# EAGLE board Laptimer (EAGLE 6.3)
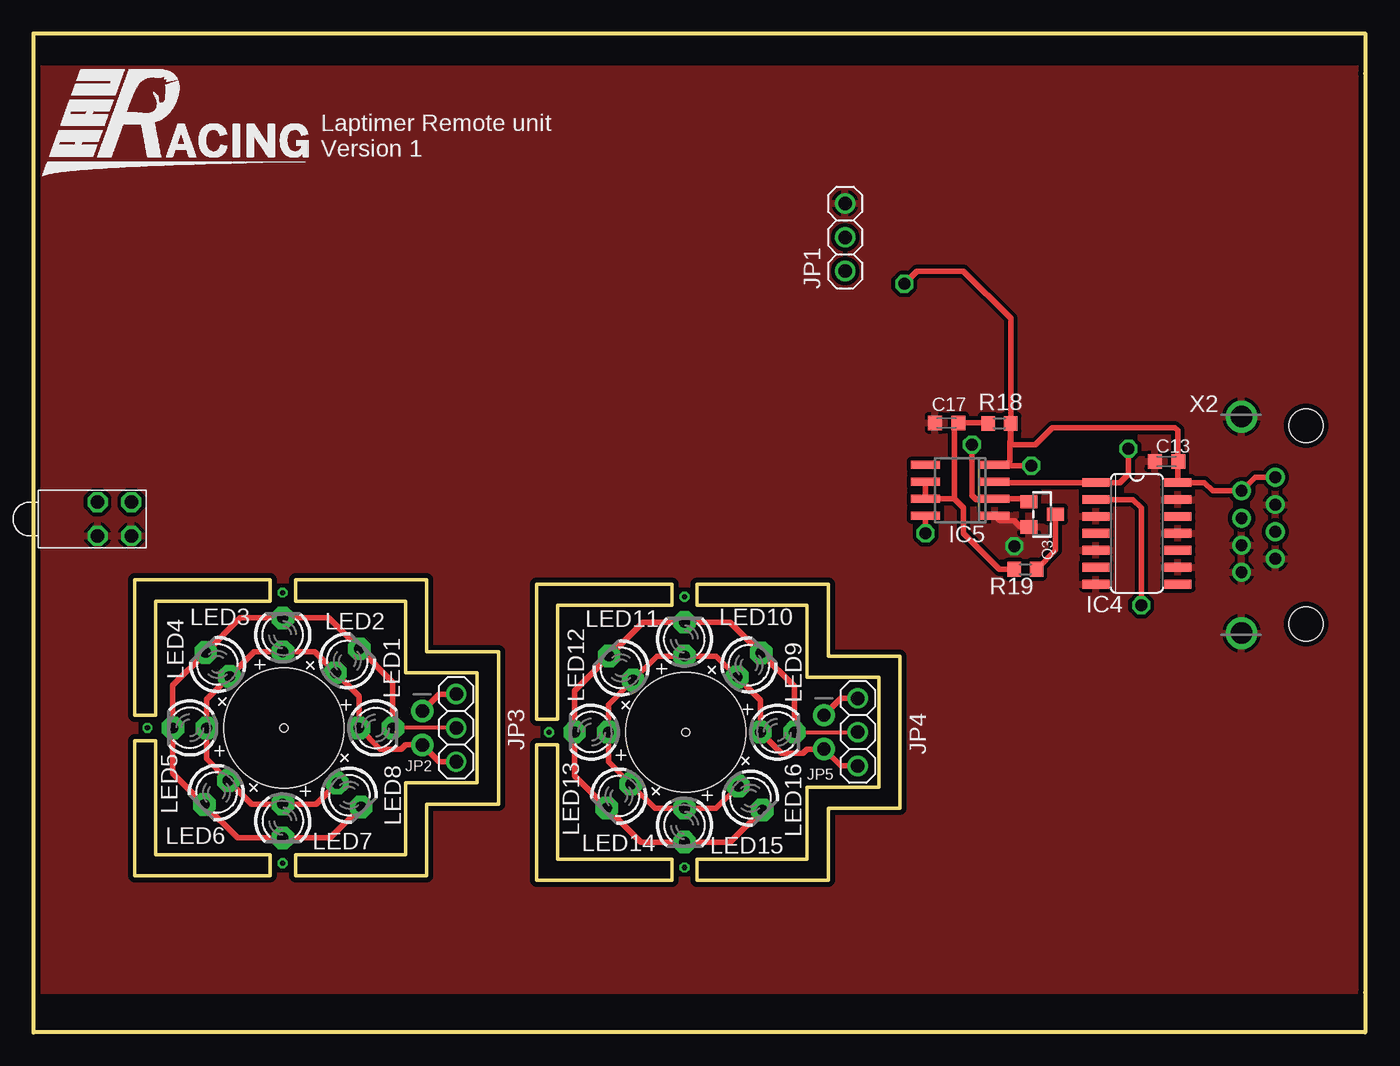
[diagram p0: board, top side]
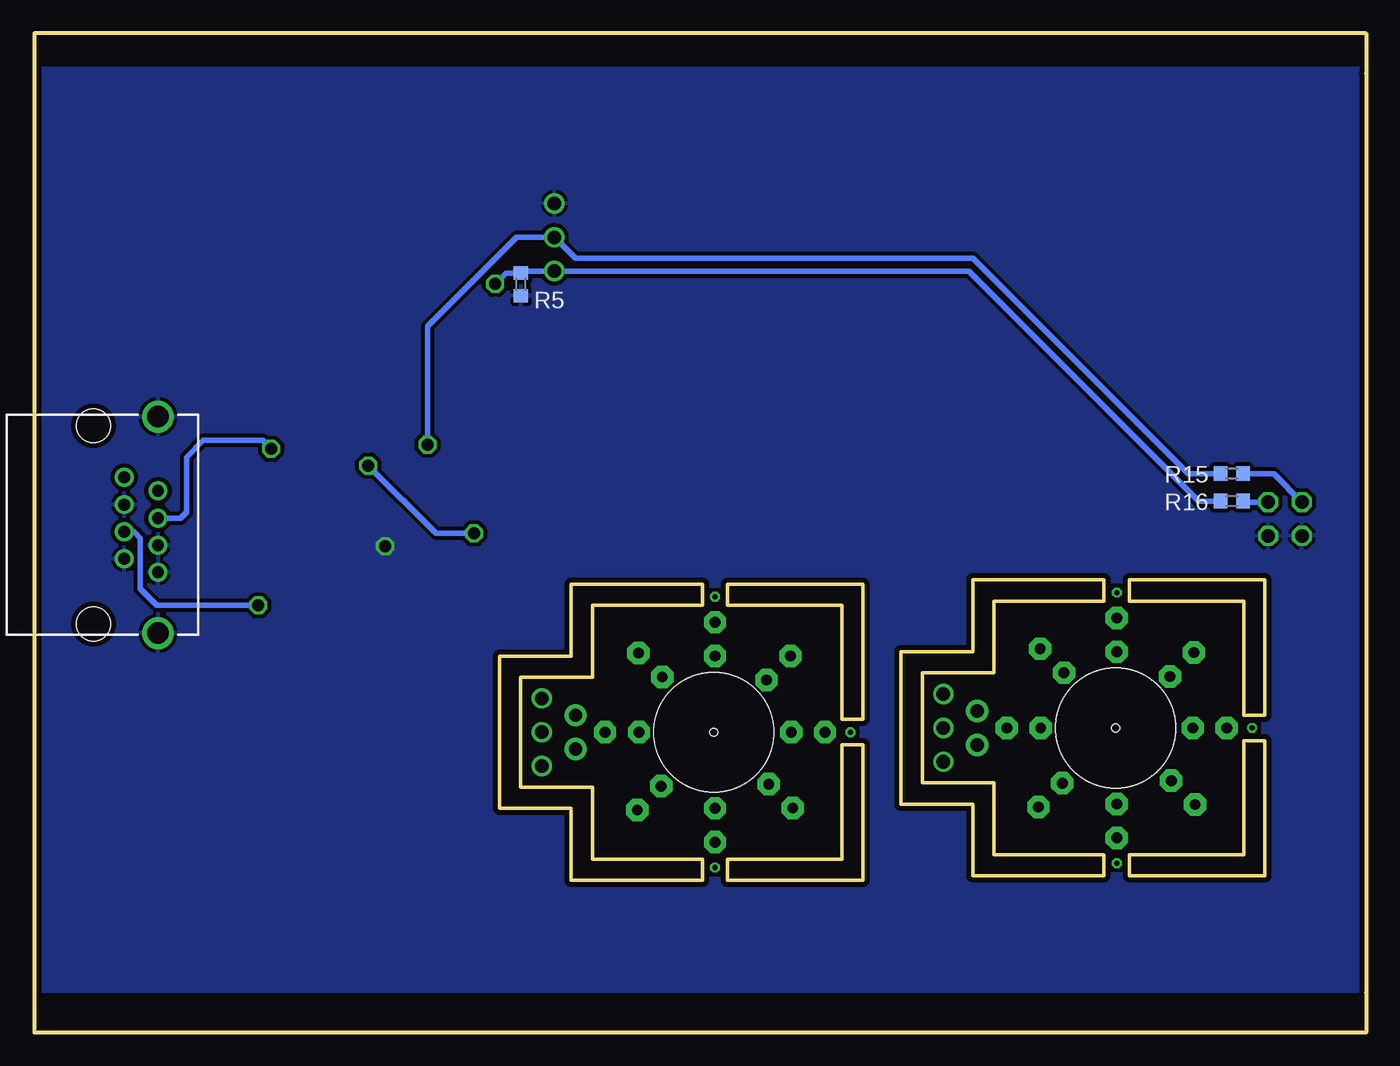
[diagram p1: board, bottom side, seen from below]

Size 100 x 75 mm. Coordinates in mm from the lower left corner, seen from the top.
Outline: 0,75 100,75 100,72 100,3 100,0 0,0 0,3 0,72 0,75
Outline: 33.34,18.73 33.34,26.99 27.94,26.99 27.94,32.38 19.68,32.38 19.68,33.97 29.53,33.97 29.53,28.57 34.92,28.57 34.92,17.14 29.53,17.14 29.53,11.75 19.68,11.75 19.68,13.34 27.94,13.34 27.94,18.73 33.34,18.73
Outline: 9.21,13.34 17.78,13.34 17.78,11.75 7.62,11.75 7.62,21.91 9.21,21.91 9.21,13.34
Outline: 9.21,32.38 17.78,32.38 17.78,33.97 7.62,33.97 7.62,23.81 9.21,23.81 9.21,32.38
Outline: 63.5,18.41 63.5,22.54 63.5,26.67 58.1,26.67 58.1,32.07 49.85,32.07 49.85,33.66 59.69,33.66 59.69,28.26 65.09,28.26 65.09,16.83 59.69,16.83 59.69,11.43 49.85,11.43 49.85,13.02 58.1,13.02 58.1,18.41 63.5,18.41
Outline: 39.37,13.02 47.94,13.02 47.94,11.43 37.78,11.43 37.78,21.59 39.37,21.59 39.37,13.02
Outline: 39.37,32.07 47.94,32.07 47.94,33.66 37.78,33.66 37.78,23.5 39.37,23.5 39.37,32.07
Copper layers (1*16): Top 0.0356mm / dielectric 1.5011mm / Bottom 0.0356mm
Design rules "LaenPCBOrder *": minimum track width 6mil, minimum drill 13mil, track to track 12mil, track to pad 12mil, pad to pad 12mil, via to via 12mil, smd to smd 12mil, copper to edge 15mil, drill to drill 6mil, minimum pad ring 7mil, minimum via ring 7mil, stop-mask expansion 3mil, vias tented up to drill 0mil, thermal gap 10mil
Holes 9 mm at 18.83,22.86 48.99,22.54
Holes 0.6 mm at 18.82,22.85 48.99,22.53

## Footprints (pad centres in the part's own frame; a part is rotated, then mirrored left to right if it is on the bottom)
C0603K = smd 1.05 x 1.08: 1 -0.875,0; 2 0.875,0
SO14 = smd 0.66 x 2.032: 1 -3.81,-3.073; 2 -2.54,-3.073; 3 -1.27,-3.073; 4 0,-3.073; 5 1.27,-3.073; 6 2.54,-3.073; 7 3.81,-3.073; 8 3.81,3.073; 9 2.54,3.073; 10 1.27,3.073; 11 0,3.073; 12 -1.27,3.073; 13 -2.54,3.073; 14 -3.81,3.073
SO08 = smd 0.6 x 2.2: 1 -1.905,-2.6; 2 -0.635,-2.6; 3 0.635,-2.6; 4 1.905,-2.6; 5 1.905,2.6; 6 0.635,2.6; 7 -0.635,2.6; 8 -1.905,2.6
1X03 = drill 1.016: 1 -2.54,0; 2 0,0; 3 2.54,0
1X02_ROUND = drill 1 pad 1.676: 1 -1.27,0; 2 1.27,0
LED3MM = drill 0.813 pad 1.676 octagon: A -1.27,0; K 1.27,0
SOT23-WIDE = smd 1 x 1.27: 1 -0.95,-1; 2 0.95,-1; 3 0,1
R0603 = smd 1 x 1.1: 1 -0.85,0; 2 0.85,0
BI-LEVEL-LED-INDICATOR = drill 1 octagon: ANODE1 1.27,1.27; ANODE2 1.27,-1.27; CATHODE1 -1.27,1.27; CATHODE2 -1.27,-1.27
GLX-S-88M = drill 0.9 pad 1.422: 1 -3.57,-2.3; 2 -2.55,-4.84; 3 -1.53,-2.3; 4 -0.51,-4.84; 5 0.51,-2.3; 6 1.53,-4.84; 7 2.55,-2.3; 8 3.57,-4.84 | drill 1.6 pad 2.184: S1 -8.125,-4.84; S2 8.125,-4.84 | hole 2.55: -7.44,0; 7.44,0

## Placement (x,y rotation side)
C13  100n  [C0603K]  85.09,42.86 0 top
C17  100n  [C0603K]  68.58,45.76 180 top
IC4  74HC04D  [SO14]  82.87,37.47 270 top
IC5  NE555D  [SO08]  69.6,40.7 90 top
JP1  [1X03]  60.96,59.69 90 top
JP2  [1X02_ROUND]  29.21,22.86 270 top
JP3  [1X03]  31.75,22.86 270 top
JP4  [1X03]  61.91,22.54 270 top
JP5  [1X02_ROUND]  59.37,22.54 270 top
LED1  SFH 309  [LED3MM]  25.72,22.86 0 top
LED2  SFH 309  [LED3MM]  23.59,27.9 45 top
LED3  SFH 309  [LED3MM]  18.73,29.84 90 top
LED4  SFH 309  [LED3MM]  13.84,27.62 135 top
LED5  SFH 309  [LED3MM]  11.75,22.86 180 top
LED6  SFH 309  [LED3MM]  13.75,18 225 top
LED7  SFH 309  [LED3MM]  18.73,15.88 270 top
LED8  SFH 309  [LED3MM]  23.72,17.82 315 top
LED9  SFH 309  [LED3MM]  55.88,22.54 0 top
LED10  SFH 309  [LED3MM]  53.75,27.58 45 top
LED11  SFH 309  [LED3MM]  48.9,29.53 90 top
LED12  SFH 309  [LED3MM]  44.13,27.36 135 top
LED13  SFH 309  [LED3MM]  41.91,22.54 180 top
LED14  SFH 309  [LED3MM]  43.96,17.74 225 top
LED15  SFH 309  [LED3MM]  48.9,15.56 270 top
LED16  SFH 309  [LED3MM]  53.84,17.59 315 top
Q3  [SOT23-WIDE]  75.76,38.89 270 top
R5  1k  [R0603]  63.47,56.15 270 bottom
R15  220  [R0603]  10.1,41.95 0 bottom
R16  220  [R0603]  10.1,39.88 0 bottom
R18  1k  [R0603]  72.55,45.71 180 top
R19  100  [R0603]  74.49,34.77 180 top
U$19  BI-LEVEL-LED-INDICATOR  [BI-LEVEL-LED-INDICATOR]  6.1,38.54 90 top
X2  GLX-S-88M  [GLX-S-88M]  95.57,38.1 270 top

## Library data of the parts
C13 C17 R5 R15 R16 R18 R19 = rcl
IC4 = 74xx-eu
IC5 = linear
JP1 JP3 JP4 LED1-LED16 = adafruit
JP2 JP5 Q3 = microbuilder
U$19 = unicorn_v2
X2 = con-kycon; OC_FARNELL: unknown; OC_NEWARK: unknown

## Nets
5.0V: C13.2 IC4.14 IC5.4 IC5.8 JP1.1 R5.1 R16.1 R18.1 X2.1 X2.2
GND: C13.1 C17.2 IC4.3 IC4.5 IC4.7 IC4.9 IC4.11 IC4.13 IC5.1 JP1.3 Q3.2 R5.2 U$19.CATHODE1 U$19.CATHODE2 X2.3 X2.6 X2.7 X2.8 X2.S1 X2.S2
INT: JP3.2 LED1.K LED2.K LED3.K LED4.K LED5.K LED6.K LED7.K LED8.K
INT1: JP4.2 LED9.K LED10.K LED11.K LED12.K LED13.K LED14.K LED15.K LED16.K
N$7: JP4.1 JP5.1
N$8: JP4.3 JP5.2 LED9.A LED10.A LED11.A LED12.A LED13.A LED14.A LED15.A LED16.A
N$10: JP2.1 JP3.1
N$22: IC4.2 X2.5
N$25: R15.2 U$19.ANODE1
N$32: R16.2 U$19.ANODE2
N$36: C17.1 IC5.6 IC5.7 R18.2 R19.2
N$40: JP2.2 JP3.3 LED1.A LED2.A LED3.A LED4.A LED5.A LED6.A LED7.A LED8.A
N$41: Q3.3 R19.1
PT-IN: IC5.2 JP1.2 Q3.1 R15.1
PT-OUT: IC4.1 IC5.3 X2.4

## Tracks (layer width: path | path; a pad name or v marks a point on that pad's centre or on a via)
5.0V  (via drill 0.9)
  Top 0.406: X2.1 91.75,41.67 X2.2 88.57,40.65 87.95,41.27 IC4.14 85.94,42.84 | 85.94,42.84 C13.2 | 85.94,42.84 85.94,45.19 85.72,45.4 76.52,45.4 75.25,44.13 73.41,44.13 | 73.41,44.13 R18.1 73.34,44.07 73.34,42.86 73.08,42.6 IC5.4 72.25,42.55 v74.93,42.55 | IC5.8 v66.99,37.47 | 73.41,44.13 73.41,53.59 69.85,57.15 66.36,57.15 v65.41,56.2
  Bottom 0.406: v66.99,37.47 69.85,37.47 v74.93,42.55 | R16.1 12.58,39.88 29.84,57.15 JP1.1 63.64,57.15 R5.1 64.6,57 v65.41,56.2
GND  (via drill 0.9)
  Top 0.406: IC5.1 72.57,38.42 73.66,38.42 74.13,37.94 Q3.2
  other vias: 73.66,36.51
  pour Top: 0,72.33 100.14,72.33 100.14,3.12 0.13,3.12
  pour Bottom: 0,72.33 100.14,72.33 100.14,3.12 0.13,3.12
INT
  Top 0.305: JP3.2 LED1.K
  Top 0.406: LED1.K 26.99,26.3 LED2.K 22.17,31.11 LED3.K 15.54,31.11 LED4.K 10.48,26.06 LED5.K 10.48,19.48 LED6.K 15.35,14.61 LED7.K 22.3,14.61 LED8.K
INT1
  Top 0.305: LED9.K JP4.2
  Top 0.406: LED9.K 57.15,25.98 LED10.K 52.33,30.8 LED11.K 45.77,30.8 LED12.K 40.64,25.66 LED13.K 40.64,19.27 42.65,17.25 LED14.K 45.62,14.29 LED15.K 52.33,14.29 LED16.K
N$1  (via drill 0.38)
  other vias: 18.73,12.7
N$2  (via drill 0.38)
  other vias: 8.57,22.86
N$3  (via drill 0.38)
  other vias: 18.73,33.02
N$4  (via drill 0.38)
  other vias: 48.9,12.38
N$5  (via drill 0.38)
  other vias: 38.73,22.54
N$6  (via drill 0.38)
  other vias: 48.9,32.7
N$7
  Top 0.406: JP4.1 60.64,25.08 JP5.1
N$8
  Top 0.406: JP4.3 60.64,20 JP5.2 58.1,21.27 57.78,20.95 56.2,20.95 LED9.A 54.61,24.93 LED10.A 51.28,28.26 LED11.A 46.83,28.26 LED12.A 43.18,24.61 LED13.A 43.18,20.32 LED14.A 46.67,16.83 LED15.A 51.28,16.83 LED16.A
N$10
  Top 0.406: JP3.1 30.48,25.4 JP2.1
N$22  (via drill 0.9)
  Top 0.406: v83.19,32.07 83.19,39.37 82.55,40.01 IC4.2
  Bottom 0.406: X2.5 92.52,37.59 92.04,37.12 92.04,33.31 90.81,32.07 v83.19,32.07
N$25
  Bottom 0.406: R15.2 6.96,41.95 U$19.ANODE1
N$32
  Bottom 0.406: R16.2 9.18,39.81 U$19.ANODE2
N$36
  Top 0.406: 69.16,40.06 69.85,39.37 69.85,37.47 72.55,34.77 R19.2 | 69.16,40.06 IC5.7 IC5.6 | 69.16,40.06 69.16,45.46 C17.1 71.34,45.76 R18.2
N$40
  Top 0.305: LED6.A 14.41,19.13
  Top 0.406: JP3.3 30.48,20.32 JP2.2 27.94,21.59 27.62,21.27 26.04,21.27 LED1.A 24.45,25.25 LED2.A 21.12,28.57 LED3.A 16.59,28.57 LED4.A 13.02,25 LED5.A 13.02,20.53 14.41,19.13 | LED8.A 21.25,17.14 LED7.A 16.4,17.14 LED6.A
N$41
  Top 0.406: Q3.3 76.76,36.19 R19.1
PT-IN  (via drill 0.9)
  Top 0.406: Q3.1 74.55,40.06 IC5.2 72.14,40.01 70.8,40.01 70.48,40.32 v70.48,44.13
  Bottom 0.406: R15.1 13.37,41.95 29.53,58.1 59.37,58.1 JP1.2 63.82,59.69 70.48,53.02 v70.48,44.13
PT-OUT  (via drill 0.9)
  Top 0.406: v82.23,43.81 82.23,41.91 81.6,41.27 IC4.1 72.25,41.27 IC5.3
  Bottom 0.406: X2.4 89.03,38.61 88.58,39.05 88.58,43.18 87.31,44.45 82.87,44.45 v82.23,43.81

## Text on the board
tSilk: Laptimer Remote unit / Version 1